# EAGLE board BATT_INPUT (EAGLE 9.5.2)
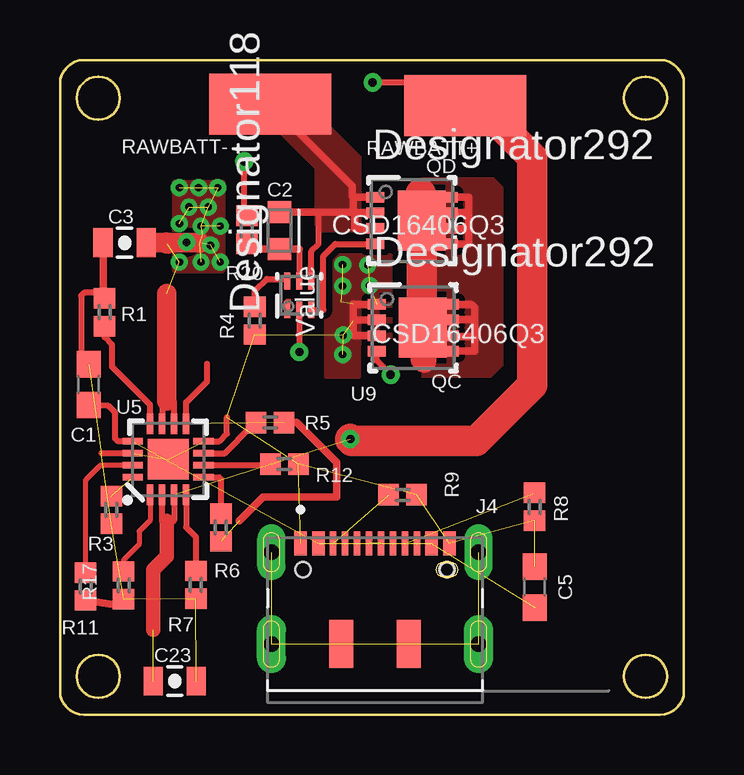
[diagram p0: board, top side]
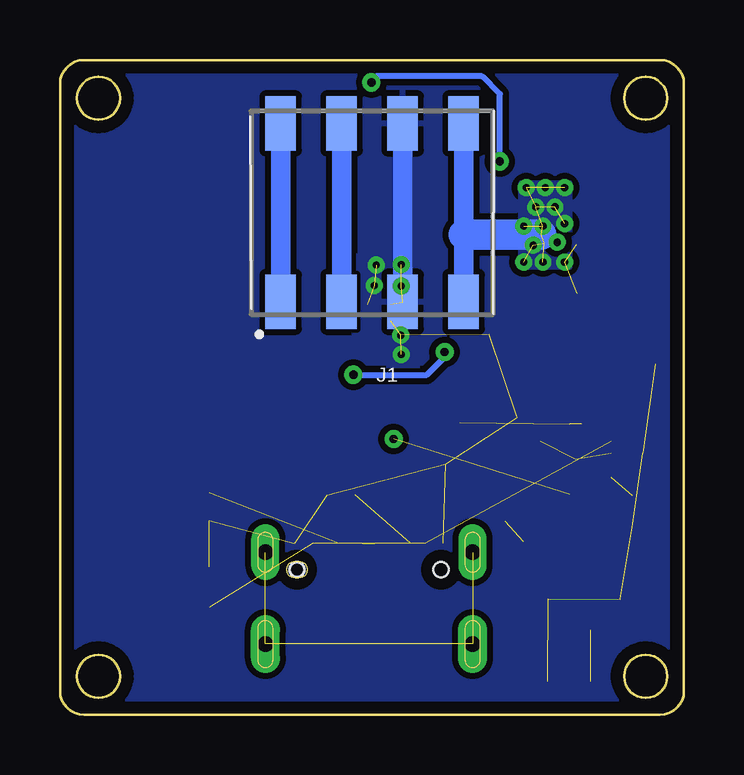
[diagram p1: board, bottom side, seen from below]

Size 26 x 27.3 mm. Coordinates in mm from the lower left corner, seen from the top.
Outline: 25.3,25.7 25.28,25.88 25.23,26.05 25.14,26.21 25.03,26.34 24.9,26.45 24.75,26.53 24.58,26.58 24.4,26.6 24.21,26.58 24.05,26.53 23.89,26.45 23.76,26.34 23.65,26.21 23.57,26.05 23.51,25.88 23.5,25.7 23.51,25.52 23.57,25.35 23.65,25.2 23.76,25.07 23.89,24.96 24.05,24.87 24.21,24.82 24.4,24.8 24.58,24.82 24.75,24.87 24.9,24.96 25.03,25.07 25.14,25.2 25.23,25.35 25.28,25.52 25.3,25.7
Outline: 25.3,25.7 25.3,25.7
Outline: 2.5,25.7 2.48,25.88 2.43,26.05 2.34,26.21 2.23,26.34 2.1,26.45 1.95,26.53 1.78,26.58 1.6,26.6 1.41,26.58 1.25,26.53 1.09,26.45 0.96,26.34 0.85,26.21 0.77,26.05 0.71,25.88 0.7,25.7 0.71,25.52 0.77,25.35 0.85,25.2 0.96,25.07 1.09,24.96 1.25,24.87 1.41,24.82 1.6,24.8 1.78,24.82 1.95,24.87 2.1,24.96 2.23,25.07 2.34,25.2 2.43,25.35 2.48,25.52 2.5,25.7
Outline: 2.5,25.7 2.5,25.7
Outline: 0.9,27.3 24.9,27.3 25.2,27.28 25.39,27.22 25.56,27.13 25.71,27.01 25.83,26.86 25.92,26.69 25.98,26.5 26,26.3 26,1 25.98,0.8 25.92,0.61 25.83,0.44 25.71,0.29 25.56,0.17 25.39,0.08 25.2,0.02 25,0 1,0 0.8,0.02 0.61,0.08 0.44,0.17 0.29,0.29 0.17,0.44 0.08,0.61 0.02,0.8 0,1 0,26.3 0.02,26.5 0.08,26.69 0.17,26.86 0.29,27.01 0.44,27.13 0.61,27.22 0.8,27.28 0.9,27.3
Outline: 2.5,1.6 2.48,1.78 2.43,1.95 2.34,2.11 2.23,2.24 2.1,2.35 1.95,2.43 1.78,2.48 1.6,2.5 1.41,2.48 1.25,2.43 1.09,2.35 0.96,2.24 0.85,2.11 0.77,1.95 0.71,1.78 0.7,1.6 0.71,1.42 0.77,1.25 0.85,1.1 0.96,0.97 1.09,0.86 1.25,0.77 1.41,0.72 1.6,0.7 1.78,0.72 1.95,0.77 2.1,0.86 2.23,0.97 2.34,1.1 2.43,1.25 2.48,1.42 2.5,1.6 2.5,1.6
Outline: 25.3,1.6 25.28,1.78 25.23,1.95 25.14,2.11 25.03,2.24 24.9,2.35 24.75,2.43 24.58,2.48 24.4,2.5 24.21,2.48 24.05,2.43 23.89,2.35 23.76,2.24 23.65,2.11 23.57,1.95 23.51,1.78 23.5,1.6 23.51,1.42 23.57,1.25 23.65,1.1 23.76,0.97 23.89,0.86 24.05,0.77 24.21,0.72 24.4,0.7 24.58,0.72 24.75,0.77 24.9,0.86 25.03,0.97 25.14,1.1 25.23,1.25 25.28,1.42 25.3,1.6 25.3,1.6
Copper layers (1+2*15+16): Top 0.035mm / dielectric 1.5mm / Route2 0.035mm / dielectric 0.15mm / Route15 0.035mm / dielectric 0.2mm / Bottom 0.035mm
Design rules "default *": minimum track width 6mil, minimum drill 0.35mm, track to track 6mil, track to pad 6mil, pad to pad 6mil, via to via 6mil, smd to smd 6mil, copper to edge 20mil, drill to drill 6mil, minimum pad ring 10mil, minimum via ring 8mil, stop-mask expansion 4mil, vias tented up to drill 0mil, thermal gap 10mil
Net classes: 1 power: width 0.178 mm; 2 gnd: width 0.305 mm, drill 0.483 mm, clearance 0.203 mm

## Footprints (pad centres in the part's own frame; a part is rotated, then mirrored left to right if it is on the bottom)
0603 = smd 1.1 x 1: 1 -0.85,0; 2 0.85,0
CAPC1608X85 = smd 0.921 x 0.97: 1 -0.775,0; 2 0.775,0
0805-CAP = smd 0.8 x 1.2: 1 -0.9,0; 2 0.9,0
70AAJ4M0 = smd 1.27 x 2.26: 1 -3.81,-3.72; 2 -1.27,-3.72; 3 1.27,-3.72; 4 3.81,-3.72; 5 3.81,3.72; 6 1.27,3.72; 7 -1.27,3.72; 8 -3.81,3.72
JAE_DX07S016JA1R1500 = smd 0.52 x 1: 1 -3.1,1.1; 2 -2.35,1.1; 11 2.35,1.1; 12 3.1,1.1 | smd 0.27 x 1: 3 -1.75,1.1; 4 -1.25,1.1; 5 -0.75,1.1; 6 -0.25,1.1; 7 0.25,1.1; 8 0.75,1.1; 9 1.25,1.1; 10 1.75,1.1 | smd 1 x 2: S1 -1.4,-3.1; S2 1.4,-3.1 | drill 0.65 long: S3 -4.32,0.725; S4 4.32,0.725 | drill 0.65 pad 1.2 long: S5 -4.32,-3.1; S6 4.32,-3.1 | hole 0.6: 3,0 | hole 0.63: 3,0; -3,0
DQG0008A = smd 0.75 x 0.44: 1 -1.525,0.975; 2 -1.525,0.325; 3 -1.525,-0.325; 4 -1.525,-0.975; 5 1.525,-0.975; 6 1.525,-0.325; 7 1.525,0.325; 8 1.525,0.975 | smd 2 x 2.5: 9 0.4,0 | smd 0.5 x 0.5: V 0.226,0.975
0402 = smd 0.85 x 0.9: 1 -0.58,0; 2 0.58,0
SMD2,54-5,08 = smd 2.54 x 5.08: 1 0,0
PVQFN-N16 = smd 0.28 x 0.85: 1 -0.75,-1.475; 2 -0.25,-1.475; 3 0.25,-1.475; 4 0.75,-1.475; 9 0.75,1.475; 10 0.25,1.475; 11 -0.25,1.475; 12 -0.75,1.475 | smd 0.85 x 0.28: 5 1.475,-0.75; 6 1.475,-0.25; 7 1.475,0.25; 8 1.475,0.75; 13 -1.475,0.75; 14 -1.475,0.25; 15 -1.475,-0.25; 16 -1.475,-0.75 | smd 1.7 x 1.7: EP 0,0
DSE0006A = smd 0.66 x 0.25: 1 -0.62,0.5 | smd 0.7 x 0.25: 2 -0.6,0; 3 -0.6,-0.5; 4 0.6,-0.5; 5 0.6,0; 6 0.6,0.5

## Placement (x,y rotation side)
C1  1.0uF  [0603]  1.2,13.76 90 top
C2  100nF  [CAPC1608X85]  9.14,20.18 90 top
C3  10uF / 10V  [0805-CAP]  2.7,19.68 180 top
C5  0.1uF  [0603]  19.77,5.32 90 top
C23  10uF / 10V  [0805-CAP]  4.78,1.4 0 top
J1  70AAJ-4-M0  [70AAJ4M0]  12.99,20.93 0 bottom
J4  DX07S016JA1R1500  [JAE_DX07S016JA1R1500]  13.12,6.05 0 top
QC  CSD16406Q3  [DQG0008A]  14.71,16.13 0 top
QD  CSD16406Q3  [DQG0008A]  14.66,20.6 0 top
R1  1K1  [0402]  1.85,16.78 270 top
R3  590  [0402]  2.14,8.54 90 top
R4  2K2  [0402]  8.12,16.43 90 top
R5  1K  [0402]  8.75,12.18 0 top
R6  10K  [0402]  6.7,7.81 90 top
R7  10K  [0402]  5.66,5.42 90 top
R8  5K1  [0402]  19.77,8.67 90 top
R9  5K1  [0402]  14.27,9.17 180 top
R11  10K  [0402]  1.06,5.35 90 top
R12  10K  [0402]  9.35,10.45 180 top
R17  10K  [0402]  2.65,5.4 90 top
R20  330  [0402]  7.78,20.21 90 top
RAWBATT+  [SMD2,54-5,08]  16.88,25.39 90 top
RAWBATT-  [SMD2,54-5,08]  8.75,25.45 90 top
U5  BQ24075  [PVQFN-N16]  4.5,10.65 0 top
U9  Value  [DSE0006A]  9.98,17.48 90 top

## Library data of the parts
C1 = SparkFun-Capacitors; PROD_ID: CAP-00868
C2 = Tutorial - Fusion 360; CATEGORY: Capacitor
C3 C23 = SparkFun-Capacitors; PROD_ID: CAP-11330
C5 = SparkFun-Capacitors; PROD_ID: CAP-00810
J1 = ANTENNA; DESCRIPTION: Bourns Male 4 Way Modular Contact, Surface Mount, 3A, 60 V; HEIGHT: 3.81mm; MANUFACTURER_NAME: Bourns; MANUFACTURER_PART_NUMBER: 70AAJ-4-M0; MOUSER_PART_NUMBER: 652-70AAJ-4-M0; MOUSER_PRICE-STOCK: https://www.mouser.com/Search/Refine.aspx?Keyword=652-70AAJ-4-M0
J4 = DX07S016JA1R1500; DESCRIPTION: USB-C (USB TYPE-C) USB 2.0 Receptacle Connector 24 (16+8 Dummy) Position Surface Mount, Right Angle; Through Hole; DIGI-KEY_PART_NUMBER: 670-DX07S016JA1R1500CT-ND; MF: JAE Electronics; MP: DX07S016JA1R1500; PACKAGE: None; PURCHASE-URL: https://pricing.snapeda.com/search/part/DX07S016JA1R1500/?ref=eda
QC QD = CSD16406Q3; DATASHEET_URL: http://www.ti.com/lit/ds/symlink/csd16406q3.pdf; IDSMAX: 60.0; MANUFACTURER_PART_NUMBER: CSD16406Q3; QGTYP: 5.8; QUANTITY: 1; RDSON45: 0.0059; VDSMAX: 25.0; VENDOR: Texas Instruments
R1 R3-R9 R11 R12 R17 R20 = SparkFun-Resistors
RAWBATT+ RAWBATT- = wirepad
U5 = battery-management-temp; PROD_ID: IC-13219
U9 = BQ2970; MANUFACTURER: Texas Instruments; PARTNUMBER: BQ29705DSER; REFDES: RefDes; TYPE: TYPE

## Nets
!CE!: R7.2 U5.4
!CHG!: U5.9
-: QC.5 QC.6 QC.7 QC.8 QC.9 QD.5 QD.6 QD.7 QD.8 QD.9
BATT+: C23.1 R20.2 RAWBATT+.1 U5.2 U5.3
BATT-: C2.2 QD.1 QD.2 QD.3 RAWBATT-.1 U9.4
D+: J4.5 J4.8
D-: J4.6 J4.7
EN1: R12.2 U5.6
EN2: R6.2 U5.5
GND: C1.2 C3.2 C5.2 C23.2 J1.3 J1.6 J4.1 J4.12 QC.1 QC.2 QC.3 R1.1 R3.1 R4.1 R7.1 R8.1 R9.1 R11.1 R12.1 R17.1 U5.8 U5.14 U5.EP
ILIM: R1.2 U5.12
ISET: R3.2 U5.16
N$1: R5.1 U5.7
N$2: J1.1 J1.8
N$3: J1.2 J1.7
N$4: J4.3 R9.2
N$5: J4.9 R8.2
N$12: C2.1 R20.1 U9.5
N$20: R4.2 U9.6
N$25: QC.4 U9.2
N$26: QD.4 U9.3
SHLD: J4.S1 J4.S2 J4.S3 J4.S4 J4.S5 J4.S6
SYSOFF: R11.2 U5.15
TS1: R17.2 U5.1
V_USB: C1.1 C5.1 J4.2 J4.11 U5.13
VSYS: C3.1 J1.4 J1.5 R5.2 R6.1 U5.10 U5.11

## Tracks (layer width: path | path; a pad name or v marks a point on that pad's centre or on a via)
!CE!
  Top 0.254: U5.4 5.25,7.82 5.66,7.41 R7.2
!CHG!
  Top 0.254: U5.9 5.25,13.03 6.12,13.9 6.12,14.64
-
  Top 0.254: 17.18,17.07 17.14,17.11
  Top 0.305: QD.8 17.02,21.58 17.02,21.57 17.02,20.92 | 17.02,20.92 17.02,20.32 | 17.02,20.32 17.02,19.62 QD.5 | QD.6 16.98,20.28 17.02,20.32 | QD.7 17.02,20.93 17.02,20.92 | QC.5 17.26,15.16 17.27,15.17 17.27,15.77 16.27,15.77 QC.6 | 17.27,15.87 17.27,16.47 | 17.27,16.47 17.27,16.97 17.18,17.07 | 17.14,17.11 QC.8 | QC.7 16.25,16.47 17.27,16.47
  Top 1.016: QC.9 15.12,14.83 15.17,14.77
  Top 1.27: 15.02,21.72 15.02,20.64 QD.9 15.06,19.03 15.07,19.02 15.06,19.01 15.06,16.18 QC.9
  pour Top: 15.07,22.37 15.07,14.07 17.98,14.07 18.48,14.57 18.48,21.97 18.07,22.37
BATT+  (via drill 0.35, 0.35 pad 0.6)  (2 unrouted)
  Top 0.254: RAWBATT+.1 15.95,25.39 14.98,26.36 v13.02,26.36 | R20.2 7.67,21.14 v7.67,23.07 | U5.2 4.25,8.07 4.45,8.07 4.73,8.07 4.75,8.1 U5.3
  Top 0.61: 4.45,8.07 4.45,6.6 3.89,6.04 3.89,3.55
  Top 1.27: RAWBATT+.1 17.53,25.39 19.68,23.25 19.68,13.75 17.35,11.42 12.15,11.42 12.1,11.47 v12.1,11.5
  Bottom 0.254: v7.67,23.07 7.67,25.87 8.42,26.62 12.83,26.62 13.02,26.42 v13.02,26.36
BATT-
  Top 0.254: U9.4 10.48,19.32 10.77,19.62 10.77,20.96
  Top 0.305: RAWBATT-.1 12.17,22.03 12.17,21.62 12.22,21.58 | 12.22,21.58 QD.1 | QD.2 12.28,20.93 12.27,20.92 | 12.24,20.96 12.22,20.98 12.22,21.58 | QD.3 12.28,20.28 12.27,20.27 12.27,20.92 | C2.2 10.77,20.96 12.24,20.96 | 12.24,20.96 12.27,20.92
  pour Top (no thermals): 10.82,24.97 12.52,23.27 12.52,20.12 10.92,20.12 10.73,20.32 10.62,20.42 10.62,22.77 9.02,24.37 9.02,24.97
D+  (1 unrouted)
D-  (1 unrouted)
EN1
  Top 0.254: R12.2 8.49,10.4 U5.6
EN2
  Top 0.254: U5.5 6.62,9.9 6.7,9.82 R6.2
GND  (via drill 0.3 pad 0.6)  (22 unrouted)
  Top 0.254: 12.23,16.41 12.23,16.42 | R1.1 1.77,17.6 1,17.6 0.88,17.47 0.88,14.98 C1.2 | U5.8 6.62,11.4 6.95,11.72 6.95,12.4 | U5.14 1.73,10.9
  Top 0.305: QC.1 12.24,17.11 | 12.24,17.11 12.23,17.12 | 12.24,17.11 12.23,17.09 12.23,16.52 | 12.23,16.52 12.23,16.42 12.23,15.82 12.24,15.81 QC.3 | QC.2 12.29,16.46 12.23,16.52 | C3.2 1.8,17.62 1.77,17.6 | R11.1 2.6,4.53 R17.1
  Bottom 0.813: J1.6 J1.3
  other vias: 11.77,18.77 12.82,18.75 12.9,17.9 11.8,15.82 11.77,15.02 11.77,17.87
  pour Bottom (isolate 0.254): -0.23,27.17 -0.23,0.17 25.77,0.17 25.77,27.17 23.77,27.17
  pour Top (isolate 0.254): 11.07,19.17 11.07,14.07 12.48,14.07 12.48,15.47 13.77,15.47 13.77,19.17
  pour Bottom: 11.07,19.17 11.07,14.17 12.35,14.17 12.35,15.47 13.77,15.47 13.77,19.07 13.67,19.17
ILIM
  Top 0.254: U5.12 3.75,12.92 2.17,14.5 2.17,15.42 1.85,15.74 R1.2
ISET  (1 unrouted)
N$1
  Top 0.254: U5.7 6.85,10.9 7.94,11.99 R5.1
N$2
  Bottom 0.813: J1.8 J1.1
N$3
  Bottom 0.813: J1.7 J1.2
N$4  (1 unrouted)
N$5  (1 unrouted)
N$12
  Top 0.254: 9.98,19.41 U9.5
  Top 0.305: R20.1 7.8,19.41 C2.1 9.98,19.41
N$14  (via drill 0.3 pad 0.6)
  other vias: 5.27,19.7
N$20
  Top 0.254: U9.6 9.38,18.17 8.62,18.17 8.12,17.66 R4.2
N$25  (via drill 0.35)
  Top 0.254: U9.2 v9.98,15.12 | v13.77,14.17 13.19,14.76 QC.4
  Bottom 0.254: v9.98,15.12 9.98,14.92 10.73,14.17 v13.77,14.17
N$26
  Top 0.254: U9.3 10.98,16.87 10.98,19.12 11.48,19.62 QD.4
SHLD  (5 unrouted)
SYSOFF
  Top 0.203: U5.15 1.68,10.4 1.06,9.79 R11.2
TS1
  Top 0.203: U5.1 3.75,8.1 3.3,7.65 3.3,7.1 2.65,6.45 R17.2
V_USB  (3 unrouted)
  Top 0.254: U5.13 2.42,11.4 2.3,11.52 2.3,12.6 2.03,12.86 C1.1
VSYS  (via drill 0.3 pad 0.6)  (17 unrouted)
  Top 0.254: 4.25,13.07 U5.11 | U5.10 4.75,13.07 4.45,13.07
  Top 0.305: 7.48,8.07 8.48,9.07 11.52,9.07 11.52,10.51 9.86,12.18 R5.2
  Top 0.813: 4.45,13.07 4.45,17.56 | C3.1 4.41,19.68 | 4.41,19.68 4.42,19.7 | 4.48,19.62 4.41,19.68 | 4.41,19.68 5.81,19.68 5.82,19.67
  Bottom 0.813: J1.5 9.18,20.02 J1.4
  Bottom 1.27: 9.18,20.02 5.95,20.02
  other vias: 4.98,21.97 5.77,21.97 5.38,21.17 6.17,21.17 6.57,21.97 4.98,20.47 5.88,20.37 6.67,20.37 6.27,19.57 5.88,18.87 6.67,18.87 4.98,18.87
  pour Bottom (isolate 0.254): 4.77,22.17 4.77,18.67 6.77,18.67 6.77,22.17
  pour Top (isolate 0.254): 4.77,22.17 4.77,18.55 6.77,18.55 6.77,22.17